# Altium PCB WashrProgV1.PcbDoc
Units mm, origin at the board's own origin, x right, y up, seen from the top; angles counter-clockwise.
Board outline 82 x 52 mm, 2 copper layers (Top Layer, Bottom Layer); 28 components, 22 nets, 111 pads, 35 vias.
Unrouted connection lines stored in the file: 2.
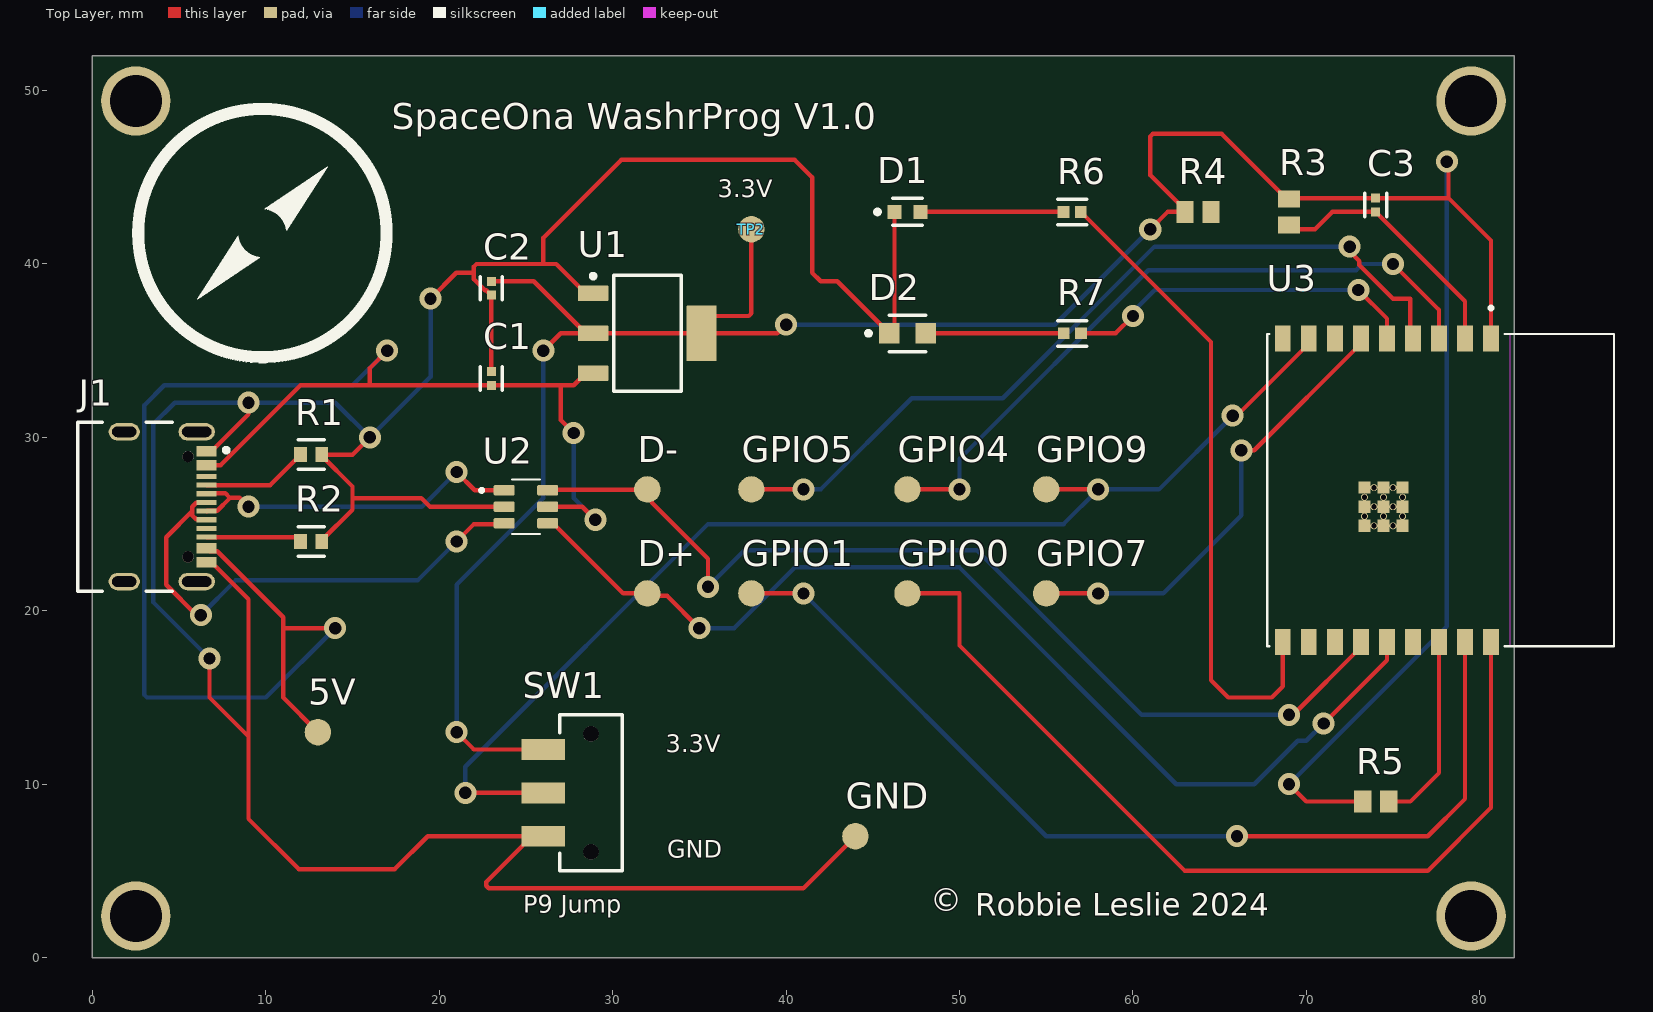
[diagram p0: Top Layer view]
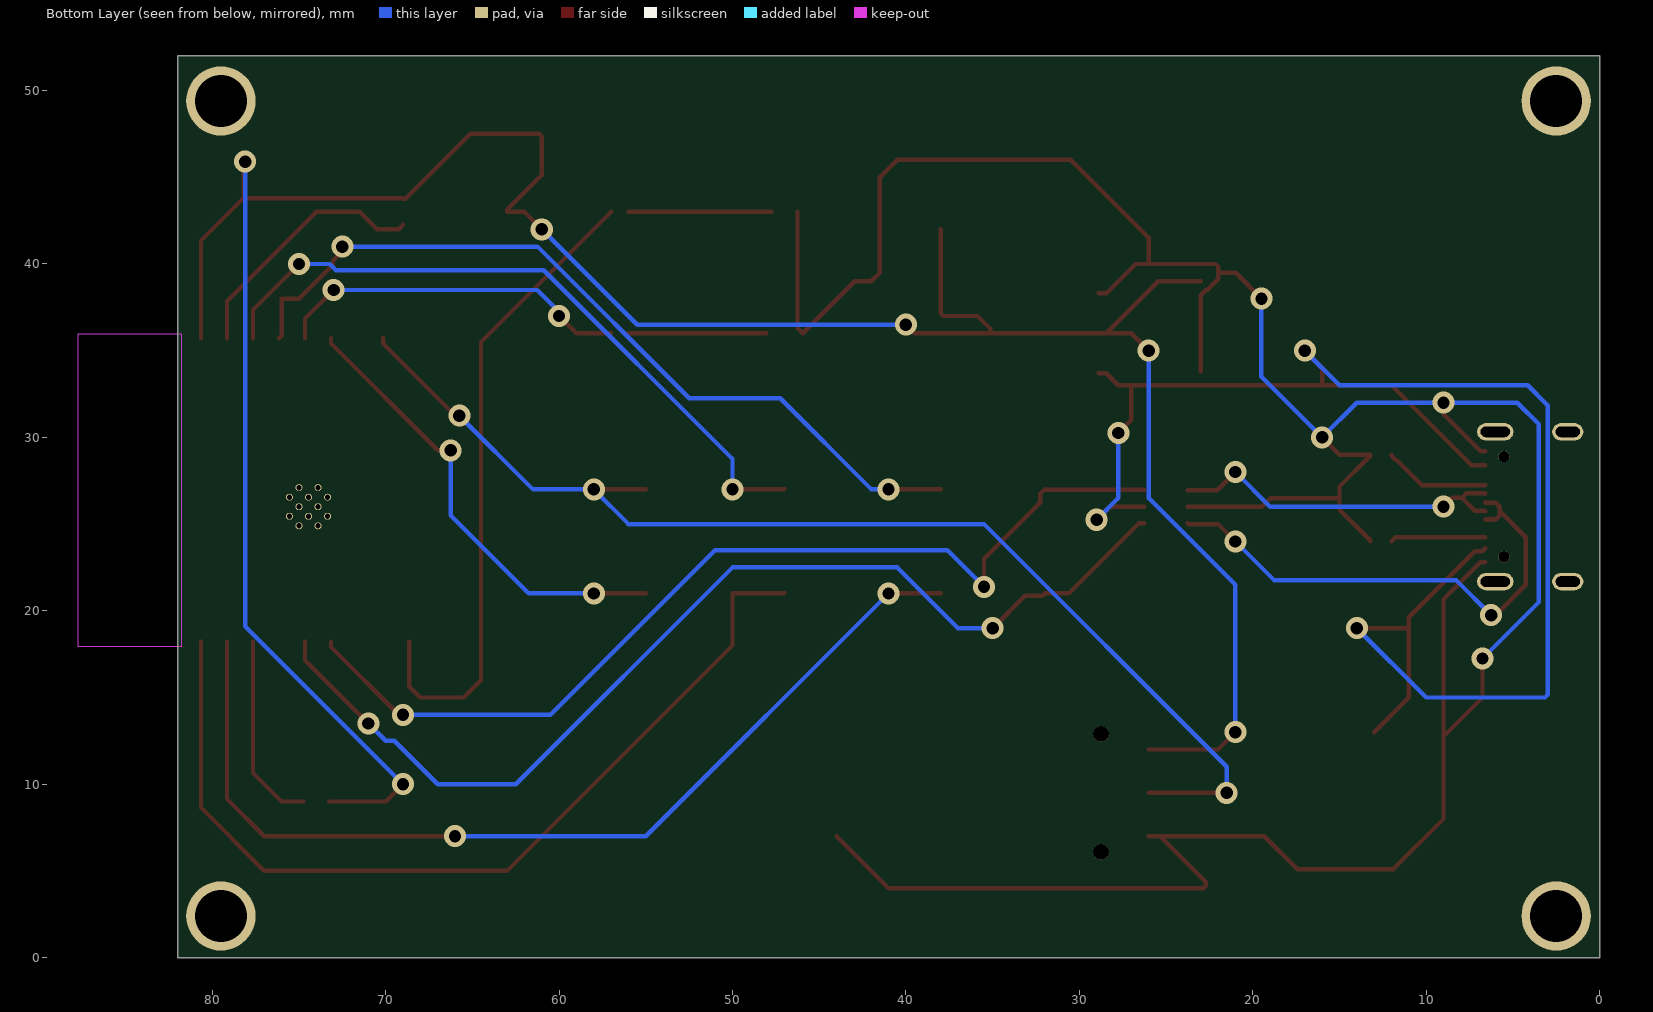
[diagram p1: Bottom Layer view, seen from below]
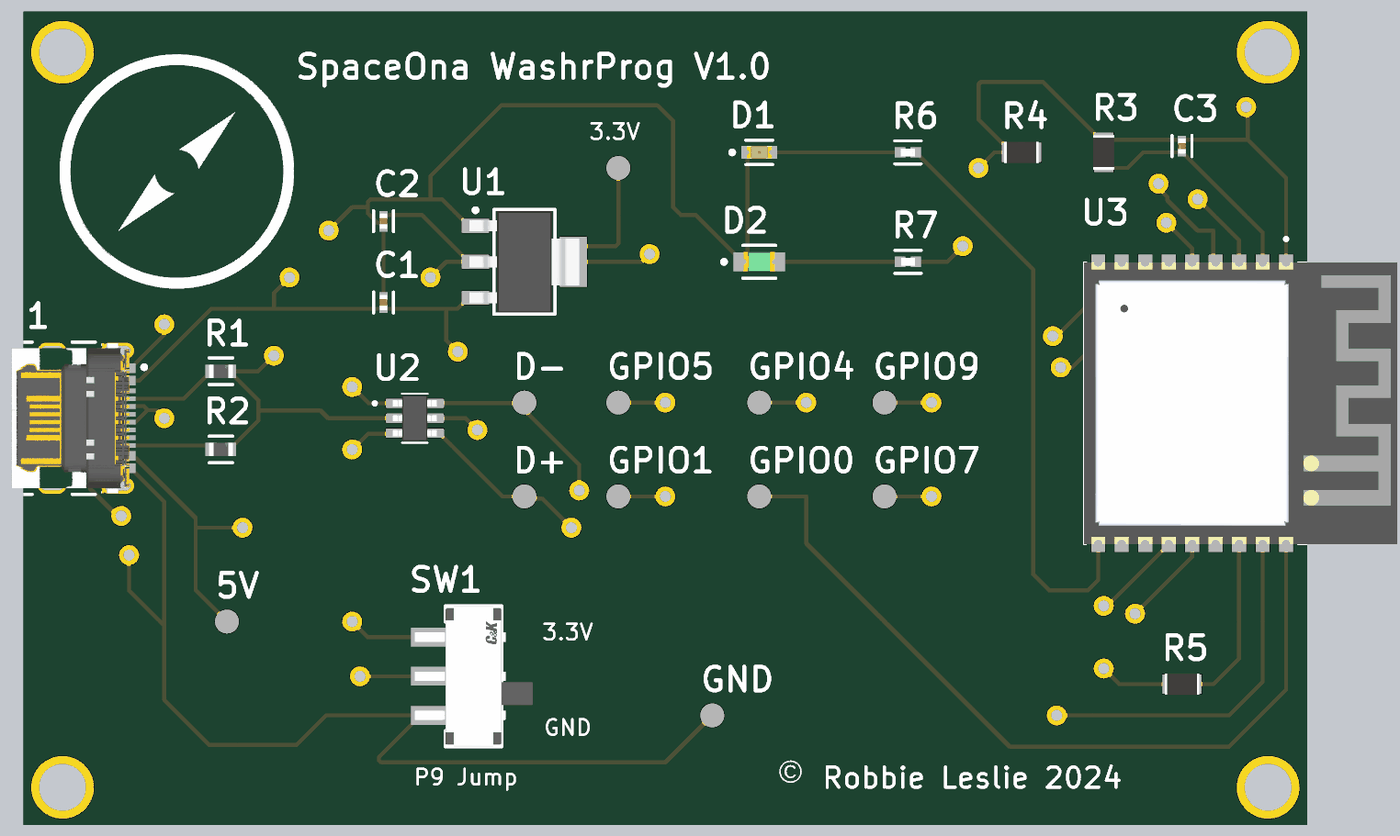
[diagram p2: 3D render of the assembled board from above, using the file's embedded part models]

## Layer stack, top to bottom
Top Solder: solder mask 0.0102, Solder Resist, Dk 3.5
Top Layer: signal copper 0.0356
Dielectric 1: dielectric 0.32, FR-4, Dk 4.8
Bottom Layer: signal copper 0.0356
Bottom Solder: solder mask 0.0102, Solder Resist, Dk 3.5

## Board outline
0,0 82,0 82,52 0,52 0,1

## Design rules (kind name [scope] priority, off if disabled: settings)
BoardOutlineClearance [All] p1: gap=0.2 ignorepadtopadclearanceinfootprint=FALSE
Clearance [All] p1: gap=0.127 ignorepadtopadclearanceinfootprint=TRUE except(0.254: Arc-Hole Track-Hole SMDPad-Hole THPad-Hole Via-Hole Fill-Hole Poly-Hole Region-Hole Text-Hole)
ComponentClearance [All] p1: gap=0.127 collisioncheckmode=3 verticalgap=0.127 showdistances=TRUE
DiffPairsRouting [All] p1: maxlimit=0.254 minlimit=0.127 mostfreqgap=0.127 toplayer_minwidth=0.127 toplayer_maxwidth=25.4 toplayer_prefwidth=0.127 bottomlayer_minwidth=0.127 bottomlayer_maxwidth=25.4 bottomlayer_prefwidth=0.127 maxuncoupledlength=12.7
Height [All] p1: minheight=0 maxheight=1816.048 prefheight=12.7
HoleSize [All] p1: absolutevalues=TRUE maxlimit=6.3 minlimit=0.3 maxpercent=80.000 minpercent=20.000
HoleToHoleClearance [All] p1: gap=0.254 allowstackedmicrovias=FALSE
MinimumAnnularRing [All] p1: minimumring=0.152
MinimumSolderMaskSliver [All] p1: minsoldermaskwidth=0.152
PlaneClearance [All] p1: clearance=0.127
PlaneConnect PlaneConnectPowerPads [InPadClass('PowerPads')] p1: planeconnectstyle=Direct reliefexpansion=0.508 reliefentries=4 reliefconductorwidth=0.254 reliefairgap=0.254
PlaneConnect [All] p2: pad.planeconnectstyle=Relief pad.reliefexpansion=0.3 pad.reliefentries=4 pad.reliefconductorwidth=0.127 pad.reliefairgap=0.127 via.planeconnectstyle=Direct via.reliefexpansion=0.3 via.reliefentries=4 via.reliefconductorwidth=0.127 via.reliefairgap=0.127
PolygonConnect PolygonConnectPowerPads [All vs (InPadClass('PowerPads'))] p1: connectstyle=Direct reliefconductorwidth=0.254 reliefentries=4 polygonreliefangle="90 Angle" airgapwidth=0.254
PolygonConnect [All] p2: thpad.connectstyle=Relief thpad.reliefconductorwidth=0.127 thpad.reliefentries=4 thpad.polygonreliefangle="90 Angle" thpad.airgapwidth=0.127 smdpad.connectstyle=Relief smdpad.reliefconductorwidth=0.127 smdpad.reliefentries=4 smdpad.polygonreliefangle="90 Angle" smdpad.airgapwidth=0.127 via.connectstyle=Direct via.reliefconductorwidth=0.127 via.reliefentries=4 via.polygonreliefangle="90 Angle" via.airgapwidth=0.127
RoutingVias [All] p1: holewidth=0.3 width=0.6 viastyle="Through Hole" minholewidth=0.3 minwidth=0.6 maxholewidth=0.6 maxwidth=6.6
SilkToSilkClearance [All] p1: silktosilkclearance=0.127
SilkToSolderMaskClearance [IsPad] p1: minsilkscreentomaskgap=0.127 clearancetoexposedcopper=TRUE
SolderMaskExpansion [All] p1: expansion=0.051 istentingtop=FALSE
SupplyNets "Schematic Supply Nets" [InNet('GND')] p1: voltage=0.000
UnRoutedNet [All] p1: checkbadconnections=TRUE
Width Width_10mil [All] p1: maxlimit=25.4 minlimit=0.254 preferedwidth=0.254 minimp=50.000000 maximp=50.000000 favimp=50.000000
Width Width_6mil [All] p2: maxlimit=25.4 minlimit=0.152 preferedwidth=0.152 minimp=50.000000 maximp=50.000000 favimp=50.000000
Width Power_20mil [All] p3: maxlimit=25.4 minlimit=0.508 preferedwidth=0.508 minimp=50.000000 maximp=50.000000 favimp=50.000000
Width Power_12mil [All] p4: maxlimit=25.4 minlimit=0.305 preferedwidth=0.305 minimp=50.000000 maximp=50.000000 favimp=50.000000
Width Width_5mil [All] p5: maxlimit=25.4 minlimit=0.127 preferedwidth=0.127 minimp=50.000000 maximp=50.000000 favimp=50.000000
19 further rules are at their usual default settings.

## Components (designator, comment, footprint, x,y, rotation, side; value= is the part's Value field where it differs from the comment)
5V "Testpin" PCBComponent_1 13,13 r0 top (schematic designator TP1)
C1 "C0402C105K8PACTU" FP-C0402C105K8PACTU-MFG 23,33.4 r90 top
C2 "C0402C105K8PACTU" FP-C0402C105K8PACTU-MFG 23,38.6 r270 top
C3 "C0402C105K8PACTU" FP-C0402C105K8PACTU-MFG 74,43.4 r270 top
D1 "LTST-C191KRKT" FP-LTST-C191KRKT-MFG 47,43 r0 top
D2 "LTST-C171GKT" FP-LTST-C171GKT-MFG 47,36 r0 top
D+ "Testpin" PCBComponent_1 32,21 r90 top (schematic designator TP9)
D- "Testpin" PCBComponent_1 32,27 r90 top (schematic designator TP7)
GND "Testpin" PCBComponent_1 44,7 r90 top (schematic designator TP3)
GPIO0 "Testpin" PCBComponent_1 47,21 r90 top (schematic designator TP4)
GPIO1 "Testpin" PCBComponent_1 38,21 r90 top (schematic designator TP5)
GPIO4 "Testpin" PCBComponent_1 47,27 r90 top (schematic designator TP8)
GPIO5 "Testpin" PCBComponent_1 38,27 r90 top (schematic designator TP10)
GPIO7 "Testpin" PCBComponent_1 55,21 r90 top (schematic designator TP11)
GPIO9 "Testpin" PCBComponent_1 55,27 r90 top (schematic designator TP6)
J1 "USB4105-GF-A" FP-USB4105-GF-A-MFG 3,26 r270 top
R1 "CRCW06035K10FKEA" FP-CRCW0603-e3-IPC_C 12.615,29 r0 top
R2 "CRCW06035K10FKEA" FP-CRCW0603-e3-IPC_C 12.615,24 r0 top
R3 "ERA-6AEB103V" RESC2013X60X40LL20T25_A 69,43 r270 top
R4 "ERA-6AEB103V" RESC2013X60X40LL20T25_A 63.75,43 r180 top
R5 "ERA-6AEB103V" RESC2013X60X40LL20T25_A 74,9 r180 top
R6 "CRCW040282R0JNED" FP-CRCW0402-e3-IPC_A 56.498,43 r0 top
R7 "CRCW040282R0JNED" FP-CRCW0402-e3-IPC_A 56.502,36 r0 top
SW1 "JS102011SAQN" FP-JS102011SAQN-MFG 28.75,9.5 r90 top
TP2 "Testpin" PCBComponent_1 38,42 r90 top
U1 "TLV1117LV33DCYR" DCY0004A_N 32,36 r0 top
U2 "USBLC6-2SC6" SOT95P280X145-6N 25,26 r0 top
U3 "ESP32-C3-WROOM-02-N4" MODULE_ESP32-C3-WROOM-02-H4 77.75,26.96 r270 top

## Footprints (in the part's own frame and the unit in brackets; to place one, negate y for a bottom-side part, rotate by r counter-clockwise, add the part's x,y. Pads: shape width x height; smd on the part's side, far side on the other; paste and mask are expansions set on the pad)
DCY0004A_N [mm] "SOT223, 4-Leads, Body 6.7x3.7mm, Pitch 2.3mm, IPC Medium Density"
  rrect11% 1.75x0.9 smd: 1(-3.125,2.3) 2(-3.125,0) 3(-3.125,-2.3)
  rrect6% 1.75x3.2 smd: 4(3.125,0)
  silkscreen extent -3.25,-3.35 1.95,3.42, body extent -3.5,-3.25 3.5,3.25, height 1.62
FP-C0402C105K8PACTU-MFG [mm]
  rect 0.52x0.52 smd paste+0 mask+0: 1(-0.4,0) 2(0.4,0)
  silkscreen extent -0.67,-0.64 0.67,0.64, body extent -0.8,-0.4 0.8,0.4, height 0.25
FP-CRCW0402-e3-IPC_A [mm]
  rect 0.668x0.672 smd paste+0 mask+0: 1(-0.502,0) 2(0.502,0)
  silkscreen extent -0.84,-0.74 0.84,0.74, body extent -1.04,-0.54 1.04,0.54, height 0.25
FP-CRCW0603-e3-IPC_C [mm]
  rect 0.735x0.862 smd paste+0 mask+0: 1(-0.615,0) 2(0.615,0)
  silkscreen extent -0.75,-0.85 0.75,0.85, body extent -1.08,-0.58 1.08,0.58, height 0.25
FP-JS102011SAQN-MFG [mm]
  rect 1.2x2.5 smd paste+0 mask+0: 1(-2.5,2.75) 2(0,2.75) 3(2.5,2.75)
  round 0.9 hole 0.9 unplated paste-2539.97 mask+0: ""(-3.4,0) ""(3.4,0)
  silkscreen extent -4.5,-1.8 4.5,1.8, body extent -4.6,-3.9 4.6,4.1, height 0.25
FP-LTST-C171GKT-MFG [mm]
  rect 1.2x1.2 smd paste+0 mask+0: 1(-1.05,0) 2(1.05,0)
  silkscreen extent -2.37,-1.05 1.05,1.05, body extent -1.75,-0.77 1.75,0.77, height 0.25
FP-LTST-C191KRKT-MFG [mm]
  rect 0.8x0.8 smd paste+0 mask+0: 1(-0.75,0) 2(0.75,0)
  silkscreen extent -1.86,-0.78 0.86,0.78, body extent -1.25,-0.55 1.25,0.55, height 0.25
FP-USB4105-GF-A-MFG [mm]
  rrect100% 1x2.1 hole 1.7 slot 0.6 at 0 deg paste-2539.97 mask+0: 1(-4.32,3.015) 2(4.32,3.015)
  rrect100% 1x1.8 hole 1.4 slot 0.6 at 0 deg paste-2539.97 mask+0: 3(-4.32,-1.165) 4(4.32,-1.165)
  rect 0.6x1.15 smd paste+0 mask+0: A1-B12(-3.2,3.59) A4-B9(-2.4,3.59) B1-A12(3.2,3.59) B4-A9(2.4,3.59)
  rect 0.3x1.15 smd paste+0 mask+0: A5(-1.25,3.59) A6(-0.25,3.59) A7(0.25,3.59) A8(1.25,3.59) B5(1.75,3.59) B6(0.75,3.59) B7(-0.75,3.59) B8(-1.75,3.59)
  round 0.65 hole 0.65 unplated paste-2539.97 mask+0: ""(-2.89,2.515) ""(2.89,2.515)
  silkscreen extent -4.86,-3.84 4.86,4.84, body extent -4.96,-3.94 4.96,4.27, height 0.25
MODULE_ESP32-C3-WROOM-02-H4 [mm]
  rect 1.5x0.9 smd: 1(-8.75,2.9) 2(-8.75,1.4) 3(-8.75,-0.1) 4(-8.75,-1.6) 5(-8.75,-3.1) 6(-8.75,-4.6) 7(-8.75,-6.1) 8(-8.75,-7.6) 9(-8.75,-9.1) 10(8.75,-9.1) 11(8.75,-7.6) 12(8.75,-6.1) 13(8.75,-4.6) 14(8.75,-3.1) 15(8.75,-1.6) 16(8.75,-0.1) 17(8.75,1.4) 18(8.75,2.9)
  rect 0.7x0.7 smd: 19(-0.14,-2.2) 20(0.96,-2.2) 21(2.06,-2.2) 22(-0.14,-3.3) 23(0.96,-3.3) 24(2.06,-3.3) 25(-0.14,-4.4) 26(0.96,-4.4) 27(2.06,-4.4)
  round 0.4 hole 0.3 mask+0: 28(0.41,-2.2) 29(1.51,-2.2) 30(-0.14,-2.75) 31(0.96,-2.75) 32(2.06,-2.75) 33(0.41,-3.3) 34(1.51,-3.3) 35(-0.14,-3.85) 36(0.96,-3.85) 37(2.06,-3.85) 38(0.41,-4.4) 39(1.51,-4.4)
  Keep-Out Layer region: 9,4 -9,4 -9,10 9,10
  Keep-Out Layer region: 9,4 -9,4 -9,10 9,10
  silkscreen extent -10.6,-10 9,10, body extent -9,-10 9,10, height 3.35
PCBComponent_1 [mil]
  round 60 smd: 1(0,0)
RESC2013X60X40LL20T25_A [mm] "Chip Resistor, 2-Leads, Body 2.20x1.35mm, IPC High Density"
  rect 1x1.25 smd: 1(-0.75,0) 2(0.75,0)
  body extent -1.1,-0.67 1.1,0.67, height 0.6
SOT95P280X145-6N [mm]
  rrect25% 1.21x0.59 smd: 1(-1.255,0.95) 2(-1.255,0) 3(-1.255,-0.95) 4(1.255,-0.95) 5(1.255,0) 6(1.255,0.95)
  silkscreen extent -2.65,-1.57 0.81,1.57, body extent -1.4,-1.46 1.4,1.46, height 1.43

## Part data
5V D+ D- GND GPIO0 GPIO1 GPIO4 GPIO5 GPIO7 GPIO9 TP2: library part Testpin1
C1 C2 C3: library part CMP-2008-02081-2, "CAP CER 1UF 10V X5R 0402", Capacitance=1uF, Case Code (Imperial)=0402, Case Code (Metric)=1005, Dielectric=X5R, Dielectric Material=Ceramic, Max Operating Temperature=85°C, Min Operating Temperature=-55°C, Package Quantity=1, Tolerance=10%, Voltage=10V, Case/Package=0402, Construction=Flat, Contact Plating=Tin, Depth=0.5mm, Dissipation Factor=5%, Height=0.5mm, Lead Free="Lead Free", Length=1mm, Mount="Surface Mount", Number of Pins=2, Packaging="Tape and Reel", Radiation Hardening=No, REACH SVHC="No SVHC", RoHS Compliant=Yes, Series=C, Termination=SMD/SMT, Thickness=0.022inch, Voltage Rating=10V, Voltage Rating (DC)=10V, Width=0.5mm
D1: library part CMP-2000-05199-2, Case Code (Imperial)=0603, Case Code (Metric)=1608, Color=Red, Current=2A, Forward Current=20mA, Forward Voltage=2V, Lens Color=Colorless, Max Operating Temperature=85°C, Min Operating Temperature=-55°C, Power Dissipation=75mW, Reverse Voltage=5V, Case/Package=0603, Depth=800µm, Dominant Wavelength=631nm, Height=550µm, Illumination Color=Red, Lead Free="Lead Free", Length=1.6mm, Lens Style=Clear, Lens Transparency=Clear, Luminous Intensity=54mcd, Mount="Surface Mount", NexarPartId=549908, Number of Elements=1, Number of LEDs=1, Number of Pins=2, Packaging="Tape and Reel", Power Rating=75mW, Radiation Hardening=No, RoHS=Compliant, Schedule B="8541402000, 8541402000", Test Current=20mA, Viewing Angle=130°, Voltage=2V, Wavelength=639nm, Width=800µm
D2: library part CMP-22017-000007-1, "LED GREEN CLEAR CHIP SMD", Case Code (Imperial)=0805, Case Code (Metric)=2012, Color=Green, Forward Current=30mA, Forward Voltage=2.1V, Lens Color=Colorless, Max Operating Temperature=85°C, Min Operating Temperature=-55°C, Package Quantity=1, Power Dissipation=100mW, Reverse Voltage=5V, Test Current=10mA, Case/Package=0805, Depth=1.25mm, Dominant Wavelength=569nm, Height=0.8mm, Illumination Color=Green, Lead Free="Lead Free", Length=2mm, Lens Style=Diffused, Lens Transparency=Clear, Luminous Intensity=12mcd, Mount="Surface Mount", Number of Elements=1, Number of LEDs=1, Number of Pins=2, Packaging="Tape and Reel", Power Rating=100mW, Radiation Hardening=No, Viewing Angle=130°, Wavelength=585nm, Width=1.25mm
J1: library part CMP-245163-000001-1, "CONN RCPT USB2.0 TYPEC 5A", Current Rating=5/6.25/1.25/0.25A, Manufacturer=GCT, Package=0, Temperature="-40°C to +85°C", Temperature Range High=+85°C, Temperature Range Low=-40°C, Voltage Rating=20V, Automotive=No, Category=Conn, ComponentLink2Description=Datasheet, ComponentLink2URL=https://gct.co/files/drawings/usb4105.pdf, Conn Orientation="Right Angle", Contact Material=Gold,Nickel, Device Class L1=Connectors, Device Class L2="USB Connectors", Device Class L3=unset, Digikey Description="CONN RCPT USB2.0 TYPEC 5A", Height=3.46mm, Is Female=yes, Lead Free=Yes, Manufacturer Part Number=USB4105-GF-A, Number Of Contacts=16, Octopart=https://octopart.com/usb4105-gf-a-gct-106627878, RoHS=TRUE, Usb Standard="USB 2.0"
R1 R2: library part CMP-1012-00590-3, "RES Thick Film, 5.1kΩ, 1%, 0.1W, 100ppm/°C, 0603", Case Code (Imperial)=0603, Case Code (Metric)=1608, Max Operating Temperature=155°C, Min Operating Temperature=-55°C, Package Quantity=5000, Power Rating=100mW, Resistance=5.1kR, Temperature Coefficient=100ppm/°C, Tolerance=1%, Voltage Rating=75V, Case/Package=0603, Composition="Thick Film", Contact Plating=Tin, Depth=0.85mm, Height=0.45mm, Lead Free="Lead Free", Length=1.55mm, Military Standard=Not, Mount="Surface Mount", Packaging="Tape and Reel", Radiation Hardening=No, Termination=SMD/SMT, Voltage Rating (DC)=75V, Weight=7.1E-05oz, Width=0.85mm
R3 R4 R5: library part CMP-2001-00582-2, "Metal Film Chip Resistor, High Reliability Type, 0.125 W, +/- 0.1%, -55 to 155 degC, 0805 (2012 Metric), RoHS, Tape and Reel", Case Code - in=0805, Case Code - mm=2012, Manufacturer=Panasonic, Operating Temperature Range=-55Cto+155C, Package / Case=0805(2012metric), Package Description="2-Pin Surface Mount Device, Body 2 x 1.25 mm", Power Rating=125mW(1/8W), Resistance=10kOhms, Temperature Coefficient=25PPM/C, Tolerance=0.1%, Voltage Rating=100V, Brand=Panasonic, Datasheet URL=https://industrial.panasonic.com/cdbs/www-data/pdf/RDM0000/AOA0000C307.pdf, Datasheet Version=02/2016, Factory Pack Quantity=5000, Height=0.5mm, Length=2mm, Manufacturer URL=http://www.panasonic.com/, Mounting Technology=SurfaceMount, Package Reference=0805, Packaging=Reel, Product=ThinFilmResistorsSMD, Product Category=ThinFilmResistors-SMD, RoHS=Details, Series=ERA-6A, Termination Style=SMD/SMT, Type=MetalFilmChipResistors, Width=1.25mm
R6 R7: library part CMP-2002-00239-2, "RES Thick Film, 82Ω, 5%, 0.063W, 200ppm/°C, 0402", Case Code (Imperial)=0402, Case Code (Metric)=1005, Max Operating Temperature=155°C, Max Power Dissipation=63mW, Min Operating Temperature=-55°C, Package Quantity=1, Resistance=82R, Temperature Coefficient=200ppm/°C, Tolerance=5%, Voltage Rating=50V, Case/Package=0402, Composition="Thick Film", Contact Plating=Tin, Depth=0.5mm, Features="Automotive AEC-Q200", Height=0.016inch, Lead Free="Lead Free", Length=1mm, Military Standard=Not, Number of Pins=2, Number of Terminations=2, Packaging="Tape and Reel", Power Rating=63mW, Radiation Hardening=No, Termination=SMD/SMT, Voltage Rating (DC)=50V, Weight=2.3E-05oz, Width=0.5mm
SW1: library part CMP-2000-06501-2, "SWITCH SLIDE SPDT 300MA 6V", Case/Package=100, Contact Current Rating=300mA, Contact Resistance=70mR, Max Operating Temperature=85°C, Max Voltage Rating (DC)=6V, Min Operating Temperature=-40°C, Package Quantity=1, Actuator Length=2mm, Actuator Material=Nylon, Actuator Type=Standard, Contact Material="Copper Alloy", Contact Plating=Silver, Current Rating=300mA, Electrical Life=5000Cycles, Housing Material=Nylon, Illumination Type=Non-Illuminated, Lead Free="Lead Free", Length=9mm, Max Current Rating=300mA, Mount="Surface Mount", Orientation="Right Angle", Packaging="Tape and Reel", Radiation Hardening=No, REACH SVHC="No SVHC", Switch Function=On-On, Switch Travel=2mm, Termination="Gull Wing", Throw Configuration=SPDT, Voltage Rating (DC)=6V
U1: library part CMP-0395-00503-2, "Single Output LDO, 1 A, Fixed 3.3 V Output, 2 to 5.5 V Input, 4-pin SOT-223 (DCY), -40 to 125 degC, Green (RoHS & no Sb/Br)", Manufacturer="Texas Instruments", Accuracy(%)=2, Code_JEDEC=TO-261, ComponentLink1Description="Manufacturer URL", ComponentLink1URL=http://www.ti.com/, ComponentLink2Description=Datasheet, ComponentLink2URL=http://www.ti.com/general/docs/lit/getliterature.tsp?genericPartNumber=TLV1117LV33&fileType=pdf, ComponentLink3Description="Package Specification", ComponentLink3URL=http://www.ti.com/litv/pdf/mpds094a, DatasheetVersion=SBVS160A, Eco-Plan="Green (RoHS & no Sb/Br)", Fixed Output Options(V)=3.3, Iout(Max)(A)=1, Iq(Typ)(mA)=0.05, Mounting Technology="Surface Mount", PackageDescription="4-Pin Plastic Small Outline, Body 3.5 x 6.5 mm, Pitch 2.3 mm", PackageReference=DCY0004A, PackageVersion=4202506/B, PartNumber=TLV1117LV33DCYR, SubFamily="Single Channel LDO", Vdo(Typ)(mV)=1200, Vin(Max)(V)=5.5, Vin(Min)(V)=2, Vout Adj(Max)(V)=3.3, Vout Adj(Min)(V)=3.3
U2: "17V Clamp 5A (8/20Âµs) Ipp Tvs Diode Surface Mount SOT-23-6", Package="SOT-23-6 STMicroelectronics", Supplier Part Number 1=7967441, Availability="In Stock", Check_prices=https://www.snapeda.com/parts/USBLC6-2SC6/STMicroelectronics/view-part/?ref=eda, MF=STMicroelectronics, MP=USBLC6-2SC6, Price=None, Purchase-URL=https://pricing.snapeda.com/search/part/USBLC6-2SC6/?ref=eda, SnapEDA_Link=https://www.snapeda.com/parts/USBLC6-2SC6/STMicroelectronics/view-part/?ref=snap, Supplier 1="Future Electronics"
U3: "WiFi Modules (802.11) (Engineering Samples) SMD module, ESP32-C3, 4MB SPI flash, PCB antenna, -40 C +85 C", Package=Package, Availability="In Stock", Check_prices=https://www.snapeda.com/parts/ESP32-C3-WROOM-02-N4/Espressif+Systems/view-part/?ref=eda, MF="Espressif Systems", MP=ESP32-C3-WROOM-02-N4, Price=None, Purchase-URL=https://pricing.snapeda.com/search/part/ESP32-C3-WROOM-02-N4/?ref=eda, SnapEDA_Link=https://www.snapeda.com/parts/ESP32-C3-WROOM-02-N4/Espressif+Systems/view-part/?ref=snap

## Free pads (board coordinates)
  round 4 hole 3: 6(2.5,2.4) 6(2.5,49.4) 6(79.5,2.4) 6(79.5,49.4)

## Via types
v1: diameter 1.27, hole 0.711, Top Layer to Bottom Layer, 35 vias

## Nets (pads, with @x,y where several pads share a name; then routed paths per layer and width w, separated by ;. In a path a pad name is that pad's centre, name@x,y a point inside that pad or via, vN(x,y) a via of type N, cw(c..) or ccw(c..) an arc to the next point about the centre after c; other vN are vias at no path point)
CC1: J1.A5 R1.1 | length 6.2
  Top Layer w0.254: J1.A5 10.25,27.25 11.696,28.696 11.759,28.696 12,28.936 R1.1
CC2: J1.B5 R2.1 | length 5.5
  Top Layer w0.254: J1.B5 11.759,24.25 12,24.009 R2.1
D+: D+.1 U2.4 U3.14 | length 61.6
  Top Layer w0.254: U2.4 26.565,25.05 30.615,21 D+.1 32.143,20.857 33.143,20.857 v1(35,19) ; v1(71,13.5) 74.65,17.15 U3.14
  Bottom Layer w0.254: v1(35,19) 37,19 40.5,22.5 50,22.5 62.5,10 67,10 69.5,12.5 70,12.5 v1(71,13.5)
D-: D-.1 U2.6 U3.13 | length 57.2
  Top Layer w0.254: U2.6 26.28,26.975 31.975,26.975 D-.1 32.243,26.757 32.243,26.257 35.5,23 v1(35.5,21.381) ; v1(69,14) 69.24,14 73.15,17.91 U3.13
  Bottom Layer w0.254: v1(35.5,21.381) 37.619,23.5 51,23.5 60.5,14 v1(69,14)
D_N: J1.A7 J1.B7 U2.1 | length 20.4
  Top Layer w0.254: J1.A7 6.613,25.773 7.197,25.773 7.934,26.51 ; J1.B7 6.613,26.773 7.671,26.773 7.934,26.51 ; v1(9,26) 8.49,26.51 7.934,26.51 ; v1(21,28) 22.05,26.95 U2.1
  Bottom Layer w0.254: v1(9,26) 19,26 v1(21,28)
D_P: J1.A6 J1.B6 U2.3 | length 30.1
  Top Layer w0.254: J1.B6@6.165,25.25 J1.B6 6.567,25.273 5.983,25.273 5.761,25.495 5.761,25.75 ; v1(6.25,19.75) 6,19.75 4.25,21.5 4.25,24.239 5.761,25.75 ; J1.A6 6.567,26.227 5.983,26.227 5.761,26.005 5.761,25.75 ; v1(21,24) 22,25 23.695,25 U2.3
  Bottom Layer w0.254: v1(6.25,19.75) 8.25,21.75 18.75,21.75 v1(21,24)
GND: C1.2 C2.2 D1.1 D2.1 GND.1 J1.A1-B12 J1.B1-A12 R1.2 R2.2 SW1.1 U1.1 U2.2 U3.9 | length 182.7
  Top Layer w0.254: J1.B1-A12 6.865,22.8 9,20.665 9,12.75 ; J1.A1-B12 6.865,29.2 9,31.335 v1(9,32) ; v1(6.75,17.25) 6.75,15 9,12.75 ; R2.2 13.231,24.064 15,25.833 15,26.5 ; v1(16,30) 15,29 R1.2 13.231,28.936 15,27.167 15,26.5 ; v1(19.5,38) 20.986,39.486 22,39.486 ; C1.2 C2.2 22.714,38.486 22.635,38.486 22,39.121 22,39.486 ; U2.2 19.468,26 18.968,26.5 15,26.5 ; SW1.1 SW1.1@25.35,7 ; U1.1 28.45,38.3 26.75,40 26,40 ; GND.1 41,4 22.858,4 22.709,4.149 22.709,4.359 SW1.1@25.35,7 ; D1.1 46.25,36.3 D2.1 42.95,39 42,39 41.5,39.5 41.5,45 40.5,46 30.5,46 26,41.5 26,40 ; 9,12.75 9,8 11.895,5.105 17.438,5.105 19.333,7 SW1.1@25.35,7 ; 22,39.486 22,39.851 22.149,40 26,40
  Bottom Layer w0.254: v1(6.75,17.25) 3.5,20.5 3.5,30.75 4.75,32 v1(9,32) 14,32 v1(16,30) 19.5,33.5 v1(19.5,38)
GPIO0: GPIO0.1 U3.18 | length 53.1
  Top Layer w0.254: GPIO0.1 50,21 50,18 63,5 77,5 80.65,8.65 U3.18
GPIO1: GPIO1.1 U3.17 | length 56.9
  Top Layer w0.254: GPIO1.1 v1(41,21) ; v1(66,7) 77,7 79.15,9.15 U3.17
  Bottom Layer w0.254: v1(41,21) 55,7 v1(66,7)
GPIO4: GPIO4.1 U3.3 | length 39.8
  Top Layer w0.254: GPIO4.1 v1(50,27) ; v1(75,40) 77.65,37.35 U3.3
  Bottom Layer w0.254: v1(50,27) 50,28.757 60.882,39.639 72.868,39.639 73.229,40 v1(75,40)
GPIO5: GPIO5.1 U3.4 | length 47.7
  Top Layer w0.254: GPIO5.1 v1(41,27) ; v1(72.5,41) 72.5,40.725 73.058,40.167 73.058,39.942 75,38 76,38 76,35.86 U3.4
  Bottom Layer w0.254: v1(41,27) 41.016,27.016 42.016,27.016 47.25,32.25 52.5,32.25 61.25,41 v1(72.5,41)
GPIO7: GPIO7.1 U3.6 | length 26.6
  Top Layer w0.254: GPIO7.1 v1(58,21) ; v1(66.25,29.25) 66.99,29.25 73.15,35.41 U3.6
  Bottom Layer w0.254: v1(58,21) 61.75,21 66.25,25.5 v1(66.25,29.25)
IO9: GPIO9.1 SW1.2 U3.8 | length 67.8
  Top Layer w0.254: v1(21.5,9.5) SW1.2 ; GPIO9.1 v1(58,27) ; v1@66,31.25 66,31.26 70.15,35.41 U3.8
  Bottom Layer w0.254: v1(21.5,9.5) 21.5,11 35.5,25 56,25 v1(58,27) 61.5,27 v1(65.75,31.25)
NetC3_2: C3.2 R3.2 U3.2 | length 14.9
  Top Layer w0.254: R3.2 69.25,42 70.5,42 71.5,43 C3.2 79.15,37.85 U3.2
NetD1_2: D1.2 R6.1 | length 8.2
  Top Layer w0.254: D1.2 R6.1
NetD2_2: D2.2 R7.1 | length 7.9
  Top Layer w0.254: D2.2 R7.1
NetR4_1: R4.1 U3.7
NetR5_1: R5.1 U3.16 | length 11.1
  Top Layer w0.254: R5.1 76,9 77.65,10.65 U3.16
NetR6_2: R6.2 U3.10 | length 37.5
  Top Layer w0.254: R6.2 57,42.998 64.5,35.498 64.5,16 65.5,15 68,15 68.65,15.65 U3.10
NetR7_2: R7.2 U3.5 | length 20.6
  Top Layer w0.254: R7.2 59,36 v1(60,37) ; v1(73,38.5) 74.65,36.85 U3.5
  Bottom Layer w0.254: v1(60,37) 60,37.242 61.258,38.5 v1(73,38.5)
V3.3: C2.1 C3.1 R3.1 R4.2 R5.2 SW1.3 TP2.1 U1.2 U1.4 U3.1 | length 164.6
  Top Layer w0.254: v1(21,13) 22,12 SW1.3 ; C2.1 25.45,39 U1.2@28.45,36 ; v1(26,35) 27,36 U1.2@28.45,36 ; TP2.1 38,37.149 37.851,37 35.873,37 35.125,36.252 U1.4 ; v1(40,36.5) 39.5,36 U1.4 ; v1(61,42) 62,43 R4.2 63,43.125 61,45.125 61,47.351 61.149,47.5 65.125,47.5 68.875,43.75 R3.1 69.05,43.8 C3.1 78.2,43.8 ; v1(69,10) 70,9 R5.2 ; v1@78,46 78.2,45.8 78.2,43.8 ; U3.1 80.65,41.35 78.2,43.8 ; U1.2@28.45,36 U1.2 U1.4
  Bottom Layer w0.254: v1(21,13) 21,21.5 26,26.5 v1(26,35) ; v1(40,36.5) 55.5,36.5 v1(61,42) ; v1(69,10) 78.1,19.1 v1(78.1,45.9)
Vbus: 5V.1 C1.1 J1.A4-B9 J1.B4-A9 U1.3 U2.5 | length 99.8
  Top Layer w0.254: J1.B4-A9 6.763,23.427 7.197,23.427 11,19.624 11,19 ; J1.A4-B9 7.4,28.4 12,33 16,33 ; 5V.1 11,15 11,19 ; v1(14,19) 11,19 ; v1(17,35) 16,34 16,33 ; U2.5 28.25,26 v1(29,25.25) ; v1(27.75,30.25) 27,31 27,33 ; U1.3 28.45,33.7 27.75,33 27,33 ; 16,33 C1.1 27,33
  Bottom Layer w0.254: v1(14,19) 10,15 3.149,15 3,15.149 3,31.851 4.149,33 15,33 v1(17,35) ; v1(27.75,30.25) 27.75,26.5 v1(29,25.25)
pads on no net: J1. J1.1 J1.2 J1.3 J1.4 J1.A8 J1.B8 SW1. U3.11 U3.12 U3.15 U3.19 U3.20 U3.21 U3.22 U3.23 U3.24 U3.25 U3.26 U3.27 U3.28 U3.29 U3.30 U3.31 U3.32 U3.33 U3.34 U3.35 U3.36 U3.37 U3.38 U3.39

## Silkscreen, mask and mechanical layers (free items; w line width, h text height)
Top Overlay:
  drawing of 3 lines, arcs and shapes, not listed
  text "SpaceOna WashrProg V1.0" at 17.254,47.762 h1.52
  text "3.3V" at 36.05,43.85 h1
  text "3.3V" at 33.05,11.85 h1
  text "GND" at 33.15,5.75 h1
  text "P9 Jump" at 24.85,2.583 h1
  text "Robbie Leslie 2024" at 50.9,2.4 h1.3
  text "©" at 48.3,2.2 h2.3